# EAGLE board zeta2rework_lw_v29_rework (EAGLE 9.3.1)
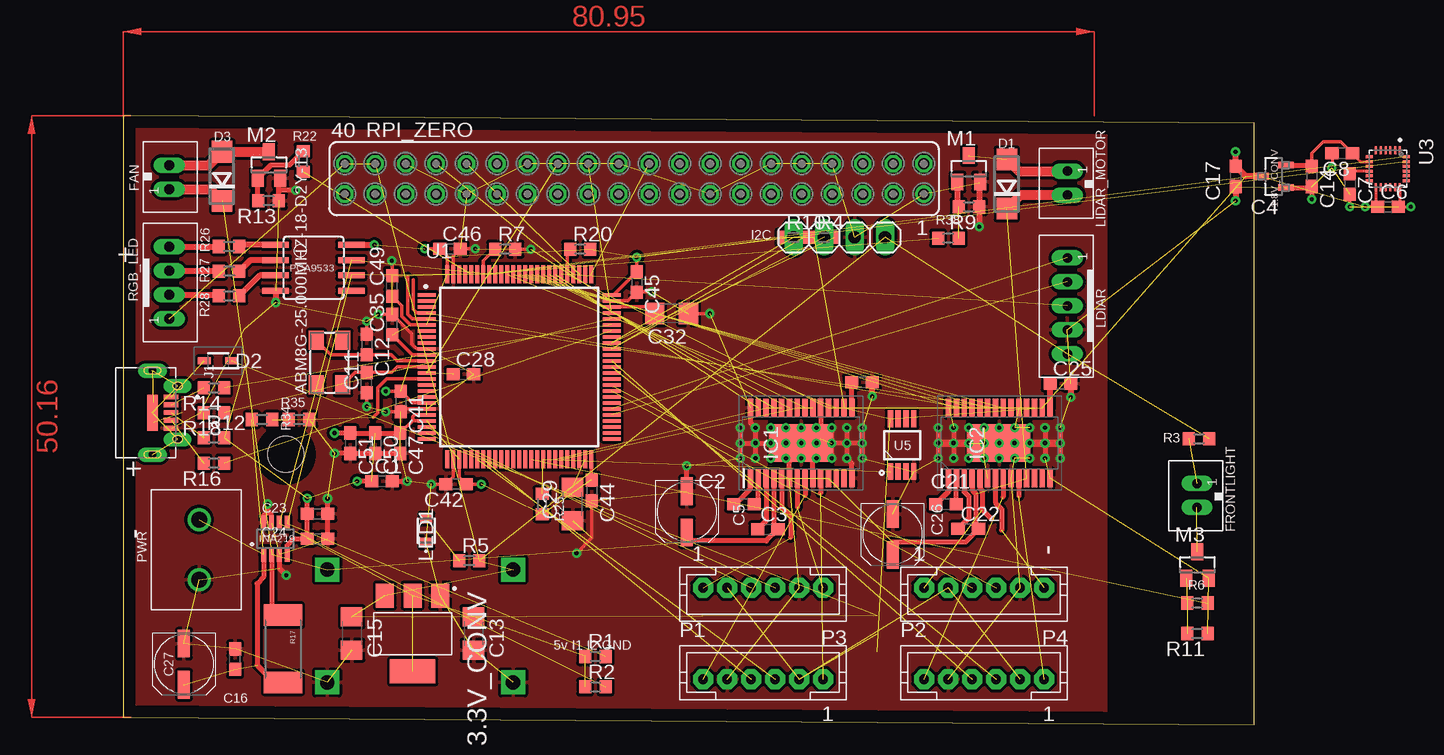
[diagram p0: board, top side]
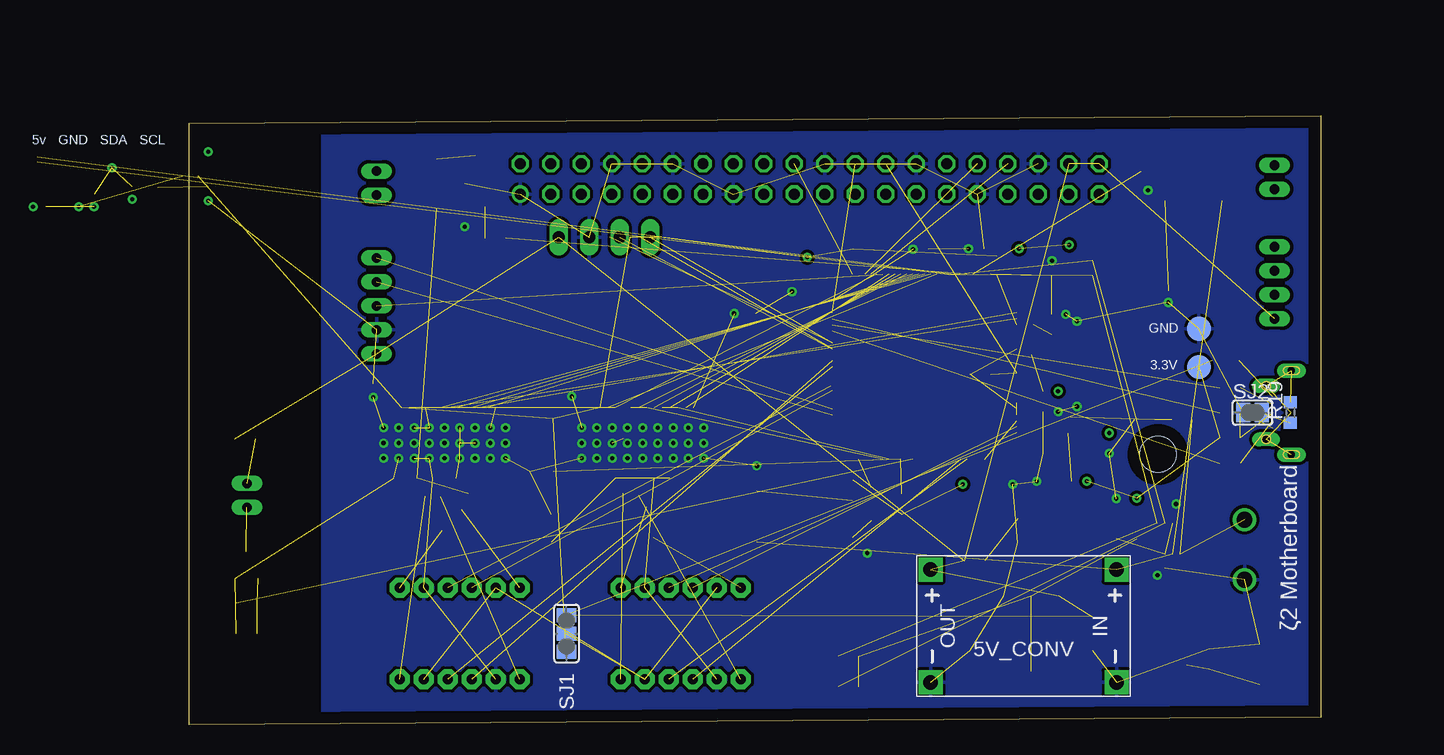
[diagram p1: board, bottom side, seen from below]

Size 94.29 x 50.79 mm. Coordinates in mm from the lower left corner, seen from the top.
Outline: 0,0.64 94.29,0 94.29,50.16 0,50.79 0,0.64
Copper layers (1+2*15+16): Top 0.035mm / dielectric 1.5mm / Route2 0.035mm / dielectric 0.15mm / Route15 0.035mm / dielectric 0.2mm / Bottom 0.035mm
Design rules "default *": minimum track width 6mil, minimum drill 0.35mm, track to track 6mil, track to pad 6mil, pad to pad 6mil, via to via 6mil, smd to smd 6mil, copper to edge 40mil, drill to drill 6mil, minimum pad ring 10mil, minimum via ring 8mil, stop-mask expansion 4mil, vias tented up to drill 0mil, thermal gap 10mil
Net classes: 0 default: clearance 0.152 mm
Holes 3 mm at 13.56,22.56

## Footprints (pad centres in the part's own frame; a part is rotated, then mirrored left to right if it is on the bottom)
SOT95P237X112-3N = smd 0.559 x 1.27: 1 -0.94,-1.041; 2 0.94,-1.041; 3 0,1.041
TP20R = smd 2 x 2: TP 0,0
SOT230P700X175-4N = smd 2 x 1.5: 1 -3.15,2.3; 2 -3.15,0; 3 -3.15,-2.3 | smd 2 x 3.8: 4 3.15,0
DC-DC-STEP-DOWN-MP2307 = drill 1.2 pad 2 square: IN+ -7.747,-4.699; IN- -7.747,4.699; OUT+ 7.747,-4.699; OUT- 7.747,4.699
5.0X3.2_KX-9A = smd 1.6 x 1.25: 1 -1.85,-1.1; 2 1.85,-1.1; 3 1.85,1.1; 4 -1.85,1.1
C0603 = smd 1.1 x 1: 1 -0.85,0; 2 0.85,0
UD-5X5,8_NICHICON = smd 2.3 x 1: + 1.725,0; - -1.7,0
C1206 = smd 1.6 x 1.8: 1 -1.4,0; 2 1.4,0
DO214AC = smd 1.8 x 1.7: A 2.05,0; C -2.05,0
SOD2513X117N = smd 1.085 x 0.55: 1 -1.14,0; 2 1.14,0
JST_B2B-PH_HEADER = drill 0.8 long: P1 1.075,0.048; P2 -0.925,0.048
1X04 = drill 1.016 long: 1 -3.81,0; 2 -1.27,0; 3 1.27,0; 4 3.81,0
SOP65P640X120-29N = smd 1.475 x 0.45: 1 -2.938,4.225; 2 -2.938,3.575; 3 -2.938,2.925; 4 -2.938,2.275; 5 -2.938,1.625; 6 -2.938,0.975; 7 -2.938,0.325; 8 -2.938,-0.325; 9 -2.938,-0.975; 10 -2.938,-1.625; 11 -2.938,-2.275; 12 -2.938,-2.925; 13 -2.938,-3.575; 14 -2.938,-4.225; 15 2.938,-4.225; 16 2.938,-3.575; 17 2.938,-2.925; 18 2.938,-2.275; 19 2.938,-1.625; 20 2.938,-0.975; 21 2.938,-0.325; 22 2.938,0.325; 23 2.938,0.975; 24 2.938,1.625; 25 2.938,2.275; 26 2.938,2.925; 27 2.938,3.575; 28 2.938,4.225 | smd 3.1 x 5.18: 29 0,0
SOT23-8 = smd 0.4 x 1.2: 1 -0.975,-1.3; 2 -0.325,-1.3; 3 0.325,-1.3; 4 0.975,-1.3; 5 0.975,1.3; 6 0.325,1.3; 7 -0.325,1.3; 8 -0.975,1.3
CUI_UJ2-MIBH2-4-SMT-TR = smd 0.4 x 1.2: 1 -1.3,2.1; 2 -0.65,2.1; 3 0,2.1; 4 0.65,2.1; 5 1.3,2.1 | drill 0.6 pad 1.2 long: SH1 -3.5,0.55; SH4 3.5,0.55 | drill 0.65 pad 1.1 long: SH2 -2.225,2.65; SH3 2.225,2.65 | smd 3 x 0.9: SH5 0,0.55
JST_B5B-PH_HEADER = drill 0.8 long: P1 4,0.048; P2 2,0.048; P3 0,0.048; P4 -2,0.048; P5 -4,0.048
LTM673-N1R2-25 = smd 0.8 x 1: 1 -1,0; 2 1,0
SOT23 = smd 1 x 1.4: 1 -0.95,-1.1; 2 0.95,-1.1; 3 0,1.1
JST-PH6 = drill 0.813 pad 1.676 octagon: 1 5,0; 2 3,0; 3 1,0; 4 -1,0; 5 -3,0; 6 -5,0
SOIC8 = smd 0.5 x 2.2: 1 -1.905,-3.154; 2 -0.645,-3.154; 3 0.625,-3.154; 4 1.895,-3.154; 5 1.905,3.154; 6 0.635,3.154; 7 -0.635,3.154; 8 -1.905,3.154
691137710002 = drill 1.3: 1 -2.5,0; 2 2.5,0
R0603 = smd 1 x 1.1: 1 -0.85,0; 2 0.85,0
2512 = smd 1.8 x 3.2: 1 -2.8,0; 2 2.8,0
JST_B4B-PH_HEADER = drill 0.8 long: P1 2.98,0.048; P2 0.98,0.048; P3 -1.02,0.048; P4 -3.02,0.048
FE20-2 = drill 0.914: 1 -24.13,1.27 | drill 0.914 octagon: 2 -24.13,-1.27; 3 -21.59,1.27; 4 -21.59,-1.27; 5 -19.05,1.27; 6 -19.05,-1.27; 7 -16.51,1.27; 8 -16.51,-1.27; 9 -13.97,1.27; 10 -13.97,-1.27; 11 -11.43,1.27; 12 -11.43,-1.27; 13 -8.89,1.27; 14 -8.89,-1.27; 15 -6.35,1.27; 16 -6.35,-1.27; 17 -3.81,1.27; 18 -3.81,-1.27; 19 -1.27,1.27; 20 -1.27,-1.27; 21 1.27,1.27; 22 1.27,-1.27; 23 3.81,1.27; 24 3.81,-1.27; 25 6.35,1.27; 26 6.35,-1.27; 27 8.89,1.27; 28 8.89,-1.27; 29 11.43,1.27; 30 11.43,-1.27; 31 13.97,1.27; 32 13.97,-1.27; 33 16.51,1.27; 34 16.51,-1.27; 35 19.05,1.27; 36 19.05,-1.27; 37 21.59,1.27; 38 21.59,-1.27; 39 24.13,1.27; 40 24.13,-1.27
SJ_2 = smd 1.168 x 1.6: 1 -1.524,0; 2 0,0; 3 1.524,0
SJ = smd 1.168 x 1.6: 1 -0.762,0; 2 0.762,0
QFP50P1600X1600X160-100N = smd 1.5 x 0.3: 1 -7.7,6; 2 -7.7,5.5; 3 -7.7,5; 4 -7.7,4.5; 5 -7.7,4; 6 -7.7,3.5; 7 -7.7,3; 8 -7.7,2.5; 9 -7.7,2; 10 -7.7,1.5; 11 -7.7,1; 12 -7.7,0.5; 13 -7.7,0; 14 -7.7,-0.5; 15 -7.7,-1; 16 -7.7,-1.5; 17 -7.7,-2; 18 -7.7,-2.5; 19 -7.7,-3; 20 -7.7,-3.5; 21 -7.7,-4; 22 -7.7,-4.5; 23 -7.7,-5; 24 -7.7,-5.5; 25 -7.7,-6; 51 7.7,-6; 52 7.7,-5.5; 53 7.7,-5; 54 7.7,-4.5; 55 7.7,-4; 56 7.7,-3.5; 57 7.7,-3; 58 7.7,-2.5; 59 7.7,-2; 60 7.7,-1.5; 61 7.7,-1; 62 7.7,-0.5; 63 7.7,0; 64 7.7,0.5; 65 7.7,1; 66 7.7,1.5; 67 7.7,2; 68 7.7,2.5; 69 7.7,3; 70 7.7,3.5; 71 7.7,4; 72 7.7,4.5; 73 7.7,5; 74 7.7,5.5; 75 7.7,6 | smd 0.3 x 1.5: 26 -6,-7.7; 27 -5.5,-7.7; 28 -5,-7.7; 29 -4.5,-7.7; 30 -4,-7.7; 31 -3.5,-7.7; 32 -3,-7.7; 33 -2.5,-7.7; 34 -2,-7.7; 35 -1.5,-7.7; 36 -1,-7.7; 37 -0.5,-7.7; 38 0,-7.7; 39 0.5,-7.7; 40 1,-7.7; 41 1.5,-7.7; 42 2,-7.7; 43 2.5,-7.7; 44 3,-7.7; 45 3.5,-7.7; 46 4,-7.7; 47 4.5,-7.7; 48 5,-7.7; 49 5.5,-7.7; 50 6,-7.7; 76 6,7.7; 77 5.5,7.7; 78 5,7.7; 79 4.5,7.7; 80 4,7.7; 81 3.5,7.7; 82 3,7.7; 83 2.5,7.7; 84 2,7.7; 85 1.5,7.7; 86 1,7.7; 87 0.5,7.7; 88 0,7.7; 89 -0.5,7.7; 90 -1,7.7; 91 -1.5,7.7; 92 -2,7.7; 93 -2.5,7.7; 94 -3,7.7; 95 -3.5,7.7; 96 -4,7.7; 97 -4.5,7.7; 98 -5,7.7; 99 -5.5,7.7; 100 -6,7.7
QFN40P300X300X105-25N = smd 0.64 x 0.22: 1 -1.545,1; 2 -1.545,0.6; 3 -1.545,0.2; 4 -1.545,-0.2; 5 -1.545,-0.6; 6 -1.545,-1; 13 1.545,-1; 14 1.545,-0.6; 15 1.545,-0.2; 16 1.545,0.2; 17 1.545,0.6; 18 1.545,1 | smd 0.22 x 0.64: 7 -1,-1.545; 8 -0.6,-1.545; 9 -0.2,-1.545; 10 0.2,-1.545; 11 0.6,-1.545; 12 1,-1.545; 19 1,1.545; 20 0.6,1.545; 21 0.2,1.545; 22 -0.2,1.545; 23 -0.6,1.545; 24 -1,1.545
SOP65P490X95-8N = smd 1.4 x 0.45: 1 -2.2,0.975; 2 -2.2,0.325; 3 -2.2,-0.325; 4 -2.2,-0.975; 5 2.2,-0.975; 6 2.2,-0.325; 7 2.2,0.325; 8 2.2,0.975

## Placement (x,y rotation side)
1.8V_CONV  MCP1700T-1802E/TT  [SOT95P237X112-3N]  95.89,45.72 90 top
3.3V  TPSQTP20R  [TP20R]  10.16,29.84 0 bottom
3.3V_CONV  NCP1117LPST33T3G  [SOT230P700X175-4N]  24.13,7.62 270 top
5V_CONV  DC-DC-STEP-DOWN-MP2307  [DC-DC-STEP-DOWN-MP2307]  24.77,8.26 180 bottom
ABM8G-25.000MHZ-18-D2Y-T3  25mhz  [5.0X3.2_KX-9A]  17.22,30.2 90 top
C1  4.7µf  [C0603]  21.59,20.32 0 top
C2  0.01µf 100v  [C0603]  51.75,18.41 0 top
C3  0.1µF 16v  [C0603]  53.73,16.31 0 top
C4  0.47µF 6.3v  [C0603]  61.58,28.57 0 top
C5  47µF  [UD-5X5,8_NICHICON]  46.99,17.78 270 top
C6  0.1nF  [C0603]  105.41,43.18 0 top  (outside the outline)
C7  0.1nF  [C0603]  102.23,45.09 270 top  (outside the outline)
C8  0.1nF  [C0603]  101.6,47.62 180 top  (outside the outline)
C11  Xpf  [C0603]  20.29,28.52 90 top
C12  Xpf  [C0603]  20.29,31.7 270 top
C13  10µF  [C1206]  29.21,7.62 270 top
C14  1µF  [C0603]  99.06,45.72 270 top  (outside the outline)
C15  10µF  [C1206]  19.05,7.62 270 top
C16  0.1µF  [C0603]  9.35,5.49 90 top
C17  1µF  [C0603]  92.71,45.72 270 top
C21  0.01µf 100v  [C0603]  68.58,18.41 0 top
C22  0.1µF 16v  [C0603]  70.43,16.33 0 top
C23  100nf  [C0603]  16.21,17.6 0 top
C24  0.1µF  [C0603]  16.21,15.52 0 top
C25  0.47µF 6.3v  [C0603]  78.12,28.45 0 top
C26  47µF  [UD-5X5,8_NICHICON]  64.14,15.88 270 top
C27  100µF  [UD-5X5,8_NICHICON]  5.08,5.08 270 top
C28  100nF  [C0603]  28.36,29.21 0 top
C29  2.2µf Low ESR < 2ohm  [C1206]  37.46,18.41 90 top
C32  2.2µf Low ESR < 2ohm  [C1206]  45.72,34.29 180 top
C35  100nF  [C0603]  22.43,33.36 90 top
C41  100nF  [C0603]  23.14,26.95 270 top
C42  100nF  [C0603]  27.75,20.07 180 top
C44  100nF  [C0603]  39.07,19.54 270 top
C45  100nF  [C0603]  42.8,36.92 270 top
C46  100nF  [C0603]  27.24,39.67 0 top
C47  100nF  [C0603]  23.11,23.48 270 top
C49  100nF  [C0603]  22.43,36.59 90 top
C50  100nF  [C0603]  21.03,23.48 270 top
C51  1µf  [C0603]  18.95,23.48 270 top
D1  1N4004 SMD  [DO214AC]  73.66,45.09 90 top
D2  BAT60JFILM  [SOD2513X117N]  7.92,30.35 180 top
D3  1N4004 SMD  [DO214AC]  8.26,45.72 90 top
FAN  JST-PH_2-PIN_HEADER  [JST_B2B-PH_HEADER]  3.81,45.72 270 top
FRONTLIGHT  JST-PH_2-PIN_HEADER  [JST_B2B-PH_HEADER]  89.54,19.05 90 top
GND  TPSQTP20R  [TP20R]  10.16,33.02 0 bottom
I2C  [1X04]  59.69,40.64 0 top
IC1  DRV8844PWPR  [SOP65P640X120-29N]  56.52,23.49 90 top
IC2  DRV8844PWPR  [SOP65P640X120-29N]  73.03,23.49 90 top
INA219  INA219  [SOT23-8]  12.7,15.52 0 top
J1  UJ2-MIBH2-4-SMT-TR  [CUI_UJ2-MIBH2-4-SMT-TR]  1.91,26.03 270 top
LDIAR  JST-PH_5-PIN_HEADER  [JST_B5B-PH_HEADER]  78.74,34.92 90 top
LED1  LT M673  [LTM673-N1R2-25]  25.27,16.21 90 top
LIDAR_MOTOR  JST-PH_2-PIN_HEADER  [JST_B2B-PH_HEADER]  78.74,45.09 90 top
M1  IRLML2502  [SOT23]  70.48,46.35 0 top
M2  IRLML2502  [SOT23]  12.17,46.66 0 top
M3  IRLML2502  [SOT23]  89.54,13.33 0 top
P1  [JST-PH6]  53.34,3.81 0 top
P2  [JST-PH6]  71.76,3.81 0 top
P3  [JST-PH6]  53.34,11.43 180 top
P4  [JST-PH6]  71.76,11.43 180 top
PCA9533  PCA9533  [SOIC8]  15.88,38.1 270 top
PWR  691137710002  [691137710002]  6.35,14.6 270 top
R1  10k  [R0603]  39.37,5.71 0 top
R2  10k  [R0603]  39.37,3.18 0 top
R3  0R  [R0603]  89.66,23.85 180 top
R4  10k  [R0603]  58.42,40.64 0 top
R5  220R  [R0603]  28.85,13.69 0 top
R6  22R  [R0603]  89.54,10.16 180 top
R7  10k  [R0603]  31.85,39.65 0 top
R9  100k  [R0603]  70.48,43.18 180 top
R10  10k  [R0603]  55.88,40.64 0 top
R11  100k  [R0603]  89.54,7.62 180 top
R12  1k5  [R0603]  7.57,23.93 0 top
R13  100k  [R0603]  12.14,43.69 180 top
R14  22r  [R0603]  7.57,28.09 180 top
R16  100k  [R0603]  7.57,21.82 180 top
R17  0.1/1% (PT2512FK-070R1L)  [2512]  13.33,6.35 270 top
R18  22r  [R0603]  7.57,26.01 180 top
R19  100r  [R0603]  2.54,26.03 90 bottom
R20  100k  [R0603]  38.1,39.65 0 top
R22  22R  [R0603]  15.01,46.96 90 top
R25  4k7  [R0603]  34.92,18.41 270 top
R26  220R  [R0603]  8.84,39.88 180 top
R27  220R  [R0603]  8.84,37.82 180 top
R28  220R  [R0603]  8.84,35.76 180 top
R34  100k  [R0603]  11.58,25.45 180 top
R35  69k  [R0603]  14.68,25.45 180 top
R38  22R  [R0603]  68.78,40.56 0 top
RGB_LED  JST-PH_4-PIN_HEADER  [JST_B4B-PH_HEADER]  3.81,36.83 270 top
RPI_ZERO  [FE20-2]  42.6,45.52 180 top
SJ1  [SJ_2]  62.86,7.62 270 bottom
SJ2  [SJ]  5.69,26.03 0 bottom
U1  STM32F427VI  [QFP50P1600X1600X160-100N]  33.02,29.84 0 top
U3  ICM-20948  [QFN40P300X300X105-25N]  105.41,46.35 270 top  (outside the outline)
U5  DS18B20U+  [SOP65P490X95-8N]  64.92,23.32 90 top

## Library data of the parts
1.8V_CONV = MCP1700T-2102E_TT; AVAILABILITY: Unavailable; DESCRIPTION: 250mA CMOS LDO, Isupply 1uA and 2% VoutAccuracy; MF: Microchip; MP: MCP1700T-2102E/TT; PACKAGE: SOT-23 Microchip; PRICE: None
3.3V GND = testpad
3.3V_CONV = NCP1117LPST33T3G; AVAILABILITY: Unavailable; DESCRIPTION: Linear Voltage Regulator, Positive, LDO, 1.0 A _Fixed and Adjustable_ Vout: 3.3 V; MF: ON Semiconductor; MP: NCP1117LPST33T3G; PACKAGE: SOT-223 ON Semiconductor; PRICE: None
5V_CONV = diy-modules
ABM8G-25.000MHZ-18-D2Y-T3 = crystal-geyer_V1_0
C1-C8 C11-C17 C21-C29 C32 C35 C41 C42 C44-C47 C49-C51 = rcl; SPICEPREFIX: C
D1 D3 = diode
D2 = BAT60JFILM; ALLIED_NUMBER: 70389806; ALLIED_PRICE-STOCK: http://www.alliedelec.com/stmicroelectronics-bat60jfilm/70389806/; DESCRIPTION: BAT60JFILM, Schottky Diode, 3A max, 10V, 2-Pin, SOD-323; HEIGHT: 1.17mm; MANUFACTURER_NAME: STMicroelectronics; MANUFACTURER_PART_NUMBER: BAT60JFILM; MOUSER_PART_NUMBER: 511-BAT60JFILM; MOUSER_PRICE-STOCK: https://www.mouser.com/Search/Refine.aspx?Keyword=511-BAT60JFILM; RS_PART_NUMBER: 1458781; RS_PRICE-STOCK: http://uk.rs-online.com/web/p/products/1458781
FAN FRONTLIGHT LDIAR LIDAR_MOTOR RGB_LED = srg
I2C = pinhead
IC1 IC2 = DRV8844PWPR; DESCRIPTION: 5A Brushed DC motor or Quad 1.75A Solenoid/Relay Driver with +/-30V split supply support (PWM Ctrl); HEIGHT: 1.2mm; MANUFACTURER_NAME: Texas Instruments; MANUFACTURER_PART_NUMBER: DRV8844PWPR; MOUSER_PART_NUMBER: 595-DRV8844PWPR; MOUSER_PRICE-STOCK: https://www.mouser.com/Search/Refine.aspx?Keyword=595-DRV8844PWPR
INA219 = INA219; AVAILABILITY: Unavailable; DESCRIPTION: the ina219 is a high-side current shunt and power monitor with an i2c interface. the ina219 monitors both shunt drop ...; MF: Texas Instruments; MP: INA219; PACKAGE: None; PRICE: None
J1 = UJ2-MIBH2-4-SMT-TR; AVAILABILITY: Unavailable; CUI_PURCHASE_URL: https://www.cui.com/product/interconnect/usb-connectors/micro-b/uj2-mibh2-4-smt?utm_source=snapeda.com&utm_medium=referral&utm_campaign=snapedaBOM; DESCRIPTION: Micro B Type 5 Pin Horizontal 30 µin Plating SMT USB Jack 2.0; MF: CUI Inc.; MP: UJ2-MIBH2-4-SMT-TR; PACKAGE: None; PRICE: None
LED1 = LT_M673-N1R2-25; DESCRIPTION: Osram Opto LT M673-N1R2-25, Mini TOPLED Series Green LED, 529 nm,, Rectangle Lens SMD Package; HEIGHT: mm; MANUFACTURER_NAME: OSRAM Opto Semiconductors; MANUFACTURER_PART_NUMBER: LT M673-N1R2-25; MOUSER_PART_NUMBER: 720-LTM673N1R225Z; MOUSER_PRICE-STOCK: https://www.mouser.com/Search/Refine.aspx?Keyword=720-LTM673N1R225Z; RS_PART_NUMBER: 9133231; RS_PRICE-STOCK: http://uk.rs-online.com/web/p/products/9133231
M1-M3 = IRLML2502TRPBF; AVAILABILITY: Unavailable; DESCRIPTION: Single N-Channel 20 V 0.08 Ohm 12 nC 1.25 W Silicon SMT Mosfet - SOT-23; MF: Infineon; MP: IRLML2502TRPBF; PACKAGE: SOT-23-3 Infineon; PRICE: None
P1-P4 = jst-ph
PCA9533 = adam - ics
PWR = term block; AVAILABILITY: Unavailable; DESCRIPTION: Term Block 2pos Side Entry 5mm; MF: Wurth Electronics; MP: 691137710002; PACKAGE: None; PRICE: None
R1-R7 R9-R14 R16 R18-R20 R22 R25-R28 R34 R35 R38 = rcl; SPICEPREFIX: R
R17 = microbuilder
RPI_ZERO = con-lsta; OC_FARNELL: unknown; OC_NEWARK: unknown
SJ1 SJ2 = jumper
U1 = STM32F427VGT7; AVAILABILITY: Unavailable; DESCRIPTION: Ic Mcu 32bit 1mb Flash 100lqfp; MF: STMicroelectronics; MP: STM32F427VGT7; PACKAGE: LQFP-100 STMicroelectronics; PRICE: None
U3 = ICM-20948; AVAILABILITY: Unavailable; DESCRIPTION: 9 Axis=3 Axis Gyro+3 Axis Accel+Compass. Pin For Pin With m; MF: TDK InvenSense; MP: ICM-20948; PACKAGE: QFN-24 InvenSense; PRICE: None
U5 = DS18B20U_; AVAILABILITY: Unavailable; DESCRIPTION: Date Code: 1043+; RoHS Compliant: Yes;; MF: Maxim; MP: DS18B20U+; PACKAGE: TSSOP-8 Chip Coolers; PRICE: None

## Nets
+1.8V: 1.8V_CONV.2 C8.1 C14.1 U3.8
+3V3: 1.8V_CONV.3 3.3V.TP 3.3V_CONV.2 3.3V_CONV.4 C1.1 C6.1 C13.1 C17.1 C23.1 C24.1 C35.1 C41.1 C42.1 C44.1 C45.1 C46.1 C47.1 C49.1 C50.1 C51.1 IC1.16 IC2.16 INA219.4 PCA9533.8 R1.1 R2.1 R4.1 R10.1 R12.2 R20.2 R25.2 SJ1.3 U1.6 U1.11 U1.19 U1.21 U1.22 U1.28 U1.50 U1.75 U1.100 U3.13 U5.8
+5V: 3.3V_CONV.3 5V_CONV.OUT+ C15.1 D2.1 I2C.4 LDIAR.P5 R3.1 R5.2 RGB_LED.P1 RPI_ZERO.38 RPI_ZERO.40 SJ1.1
+8V: 5V_CONV.IN+ C3.2 C5.+ C22.2 C26.+ D1.C D3.C FAN.P1 IC1.4 IC1.11 IC2.4 IC2.11 INA219.2 LIDAR_MOTOR.P2 R17.1
BAT_LVL: R34.1 R35.2 U1.15
DEC_LB_1: P1.3 U1.31
DEC_LB_2: P1.4 U1.32
DEC_LF_1: P3.3 U1.23
DEC_LF_2: P3.4 U1.24
DEC_RB_1: P2.3 U1.63
DEC_RB_2: P2.4 U1.64
DEC_RF_1: P4.3 U1.59
DEC_RF_2: P4.4 U1.60
GND: 1.8V_CONV.1 3.3V_CONV.1 5V_CONV.IN- 5V_CONV.OUT- C1.2 C4.2 C5.- C6.2 C7.2 C8.2 C11.1 C12.1 C13.2 C14.2 C15.2 C16.2 C17.2 C23.2 C24.2 C25.2 C26.- C27.- C28.2 C29.1 C32.1 C35.2 C41.2 C42.2 C44.2 C45.2 C46.2 C47.2 C49.2 C50.2 C51.2 GND.TP I2C.3 IC1.6 IC1.9 IC1.14 IC1.19 IC1.28 IC1.29 IC2.6 IC2.9 IC2.14 IC2.19 IC2.28 IC2.29 INA219.3 INA219.7 INA219.8 J1.5 LDIAR.P4 LED1.1 M1.2 M2.2 M3.2 P1.5 P2.5 P3.5 P4.5 PCA9533.4 PWR.2 R7.2 R9.1 R11.1 R13.1 R35.1 RPI_ZERO.1 RPI_ZERO.8 RPI_ZERO.12 RPI_ZERO.15 RPI_ZERO.22 RPI_ZERO.28 RPI_ZERO.31 RPI_ZERO.36 SJ2.1 U1.10 U1.20 U1.27 U1.74 U1.99 U3.18 U5.4
I2C1_SCL: INA219.5 PCA9533.6 R1.2 U1.92 U3.23
I2C1_SDA: INA219.6 PCA9533.7 R2.2 U1.93 U3.24
I2C3_SCL: I2C.1 R4.2 U1.67
I2C3_SDA: I2C.2 R10.2 U1.66
LIDAR_POS_INT: LDIAR.P3 U1.81
M_LB_IN1: IC1.23 U1.84
M_LB_IN2: IC1.21 U1.85
M_LF_IN1: IC1.27 U1.82
M_LF_IN2: IC1.25 U1.83
M_PWM_LB: IC1.20 IC1.22 U1.45
M_PWM_LF: IC1.24 IC1.26 U1.44
M_PWM_RB: IC2.20 IC2.22 U1.5
M_PWM_RF: IC2.24 IC2.26 U1.4
M_RB_IN1: IC2.23 U1.88
M_RB_IN2: IC2.21 U1.89
M_RF_IN1: IC2.27 U1.86
M_RF_IN2: IC2.25 U1.87
M_SLEEP: IC1.17 IC2.17 U1.90
N$1: C21.2 IC2.2
N$2: C21.1 IC2.1
N$3: C22.1 IC2.3
N$4: IC2.10 P2.1
N$5: J1.3 R12.1 R18.2
N$6: FRONTLIGHT.P1 R3.2
N$7: LED1.2 R5.1
N$8: C7.1 U3.10
N$9: FRONTLIGHT.P2 M3.3
N$10: M3.1 R6.2 R11.2
N$11: IC2.5 P4.1
N$12: IC2.7 P4.6
N$13: ABM8G-25.000MHZ-18-D2Y-T3.1 C11.2 U1.13
N$14: IC1.5 P3.1
N$15: D2.2 J1.1
N$16: R7.1 U1.94
N$17: J1.4 R16.2
N$18: C2.2 IC1.2
N$19: IC2.8 P2.6
N$20: C2.1 IC1.1
N$21: C3.1 IC1.3
N$22: PCA9533.1 R26.1
N$23: PCA9533.2 R27.1
N$24: PCA9533.3 R28.1
N$25: R19.1 SJ2.2
N$26: C25.1 IC2.15
N$27: IC1.7 P3.6
N$28: IC1.8 P1.6
N$29: C4.1 IC1.15
N$30: IC1.10 P1.1
N$31: R26.2 RGB_LED.P4
N$32: P1.2 P2.2 P3.2 P4.2 SJ1.2
N$33: R27.2 RGB_LED.P3
N$34: J1.2 R14.2
N$35: R28.2 RGB_LED.P2
N$36: C29.2 U1.49
N$37: M2.1 R13.2 R22.2
N$38: M1.1 R9.2 R38.2
N$39: D1.A LIDAR_MOTOR.P1 M1.3
N$40: J1.SH1 J1.SH2 J1.SH3 J1.SH4 J1.SH5 R19.2
N$44: ABM8G-25.000MHZ-18-D2Y-T3.3 C12.2 U1.12
N$45: C32.2 U1.73
N$55: D3.A FAN.P2 M2.3
NFAULT: IC1.18 IC2.18 R20.1 U1.80
NRST: C28.1 RPI_ZERO.26 U1.14
PWM1: U1.47
PWM2: U1.48
PWM3: U1.35
PWM4: U1.36
PWM_FAN: R22.1 U1.96
PWM_LIDAR: R38.1 U1.95
PWM_LIGHT: R6.1 U1.40
SWCLK: RPI_ZERO.20 U1.76
SWDIO: RPI_ZERO.24 U1.72
TEMPERATURE: R25.1 U1.42 U5.1
UART2_RX: U1.26
UART2_TX: U1.25
UART3_RX: LDIAR.P1 U1.56
UART3_TX: LDIAR.P2 U1.55
UART4_RX: RPI_ZERO.34 U1.79
UART4_TX: RPI_ZERO.32 U1.78
USB_OTG_DM: R14.1 U1.70
USB_OTG_DP: R18.1 U1.71
USB_OTG_ID: R16.1 U1.69
USB_OTG_VBUS: U1.68
V+: C16.1 C27.+ INA219.1 PWR.1 R17.2 R34.2

## Tracks (layer width: path | path; a pad name or v marks a point on that pad's centre or on a via)
+1.8V
  Top 0.254: C8.1 103.12,46.95 U3.8
  Top 0.305: C14.1 99.06,47.62 100.03,48.59 101.48,48.59 C8.1
  Top 0.406: 1.8V_CONV.2 98.97,46.66 C14.1
+3V3  (via drill 0.35)  (27 unrouted)
  Top 0.254: U3.13 104.41,43.33 C6.1 v103.51,43.18
  Top 0.305: U1.28 28.02,20.65 C42.1 v29.85,20.07 | U1.50 39.02,20.44 C44.1 | U1.75 40.88,35.84 C45.1 v42.8,38.99 | U1.100 27.02,39.05 C46.1 v25.15,39.67 | U1.11 24.1,30.84 C35.1 | U1.6 23.96,33.34 23.23,34.07 23.23,34.93 C49.1 | v21.9,27.81 21.91,27.8 C41.1 24.09,26.84 U1.19 | U1.21 24.32,25.84 24.16,25.68 24.16,25.5 24.19,25.46 | U1.22 24.31,25.34 24.19,25.46 | 23.2,24.42 24.19,25.41 24.19,25.46
  Top 0.406: 23.2,24.42 C47.1 C50.1 C51.1 v17.63,24.33 | C1.1 v19.51,20.32 | INA219.4 13.67,14.95 14.25,15.52 C24.1 C23.1 15.36,18.88 v15.34,18.9
  Top 0.508: 1.8V_CONV.3 93.56,45.72 C17.1 v92.71,47.78 | PCA9533.8 v20.96,40
+5V  (11 unrouted)
+8V  (7 unrouted)
  Top 0.406: IC1.4 54.24,16.65 C3.2 53.62,15.34 47.09,15.34 46.99,15.24 C5.+ | IC2.4 70.75,19.58 71.04,19.28 71.04,16.57 C22.2 70.19,15.24 64.14,15.24 C26.+ | INA219.2 12.38,9.7 12.92,9.15 R17.1
  Top 0.813: FAN.P1 7.28,44.64 D3.C | LIDAR_MOTOR.P2 74.79,44.16 D1.C
BAT_LVL  (2 unrouted)
  Top 0.305: 20.85,25.65 21.21,26.01 21.21,28.1 21.96,28.84 U1.15
DEC_LB_1  (1 unrouted)
DEC_LB_2  (1 unrouted)
DEC_LF_1  (1 unrouted)
DEC_LF_2  (1 unrouted)
DEC_RB_1  (1 unrouted)
DEC_RB_2  (1 unrouted)
DEC_RF_1  (1 unrouted)
DEC_RF_2  (1 unrouted)
  Top 0.152: U1.60 40.84,28.22
GND  (via drill 0.35)  (72 unrouted)
  Top 0.254: U3.18 106.41,43.33 C6.2 v107.32,43.18 | C7.2 v102.23,43.18 | C8.2 100.75,46.45 v100.74,46.43
  Top 0.305: U1.27 27.52,20.69 C42.2 v25.68,20.07 | U1.74 42.08,35.34 C45.2 42.85,36.12 v44.07,36.12 | U1.99 27.52,39.1 C46.2 v29.36,39.67 | U1.10 24.49,31.34 24.05,31.79 24.05,32.6 C35.2 v21.26,34.21 | C12.1 20.32,32.57 v20.32,33.66 | 23.16,26.12 C41.2 | C41.2 21.9,26.1 v21.9,26.11 | C44.2 39.06,15.6 v37.79,14.33 | R7.2 v33.98,39.65 | C11.1 20.32,27.65 v20.32,26.54 | U1.20 23.39,26.34 C41.2 | C32.1 v48.89,34.29 | C49.2 22.43,38.66 v22.4,38.68
  Top 0.406: IC1.19 58.14,23.85 v57.78,23.49 | v55.24,23.49 v53.98,23.49 | v52.7,23.49 v52.7,24.77 52.29,25.18 IC1.28 | v52.7,23.49 v52.7,22.23 | v51.43,24.77 v51.43,23.49 | v51.43,23.49 v51.43,22.23 | v60.32,24.77 v60.32,23.49 | v60.32,23.49 v60.32,22.23 60.74,21.81 IC1.14 | v61.59,24.77 v61.59,23.49 | v61.59,23.49 v61.59,22.23 | v59.05,24.77 v59.05,23.49 | v59.05,23.49 v59.05,22.23 | v57.78,24.77 v57.78,23.49 | v57.78,23.49 v57.78,22.23 57.49,21.93 IC1.9 | v56.52,24.77 IC1.29 | IC1.29 v56.52,22.23 | v55.24,24.77 v55.24,23.49 | v55.24,23.49 v55.24,22.23 55.54,21.93 IC1.6 | v53.98,24.77 v53.98,23.49 | v53.98,23.49 v53.98,22.23 | v51.43,23.49 v52.7,23.49 | v52.7,23.49 v53.98,23.49 | IC1.29 v55.24,23.49 | v60.32,23.49 v59.05,23.49 | v61.59,23.49 v60.32,23.49 | IC1.29 v57.78,23.49 | C5.- v46.99,21.59 | 1.8V_CONV.1 98.97,44.78 C14.2 v99.06,43.81 | v67.95,24.77 v67.95,23.49 v67.95,22.23 | v69.22,24.77 v69.22,23.49 v69.22,22.23 | v70.48,24.77 v70.48,23.49 v70.48,22.23 | v73.03,24.77 IC2.29 v73.03,22.23 | v74.3,24.77 v74.3,23.49 v74.3,22.23 | v76.84,24.77 v76.84,23.49 v76.84,22.23 | v78.11,24.77 v78.11,23.49 v78.11,22.23 | C47.2 C50.2 C51.2 v17.63,22.63 | C1.2 v23.67,20.32 | M2.2 12.91,45.36 12.99,45.28 12.99,44.45 | R13.1 12.99,44.45 | v14.4,44.55 13.09,44.55 12.99,44.45 | INA219.3 13.03,13.06 v13.61,12.47 | INA219.7 12.38,17.47 12.06,17.78 | 12.06,17.78 11.72,17.44 INA219.8 | 12.06,17.78 v12.06,18.41 | C24.2 C23.2 v17.06,18.86 v17.04,18.87
  Top 0.508: C17.2 v92.71,43.69 | M1.2 71.34,45.16 R9.1 71.34,41.54 v71.35,41.53 | C25.2 v78.97,27.3 | v62.43,27.38 C4.2 | C4.2 | PCA9533.4 v12.72,35.21 v12.72,35.2
  Top 0.61: v67.95,23.49 v69.22,23.49 v70.48,23.49 | IC2.29 v71.76,23.49 | IC2.29 v74.3,23.49 | IC2.29 v75.57,23.49 | IC2.29 v76.84,23.49 v78.11,23.49
  other vias: 56.52,23.49 71.76,24.77 71.76,22.23 73.03,23.49 75.57,24.77 75.57,22.23
  pour Top (isolate 0.254, rank 3): -1.27,51.43 -1.27,0 81.92,0 81.92,51.43
  pour Bottom (isolate 0.254, rank 3): -2.54,-1.27 -2.54,52.7 83.19,52.7 83.19,-1.27
  cutout Top: 107.95,49.53 102.87,49.53 arc90 102.23,48.89 102.23,43.81 arc90 102.87,43.18 107.95,43.18 arc90 108.59,43.81 108.59,48.89 arc90
  cutout Bottom: 108.59,44.45 108.59,48.89 arc90 107.95,49.53 102.87,49.53 arc90 102.23,48.89 102.23,44.45 arc90 102.87,43.18 107.95,43.18 arc90
I2C1_SCL  (4 unrouted)
I2C1_SDA  (4 unrouted)
I2C3_SCL  (2 unrouted)
I2C3_SDA  (2 unrouted)
LIDAR_POS_INT  (1 unrouted)
M_LB_IN1  (1 unrouted)
M_LB_IN2  (1 unrouted)
M_LF_IN1  (1 unrouted)
M_LF_IN2  (1 unrouted)
M_PWM_LB  (2 unrouted)
M_PWM_LF  (2 unrouted)
M_PWM_RB  (2 unrouted)
  Top 0.305: U1.5 24.1,33.84 23.72,34.23 23.72,37.36
M_PWM_RF  (2 unrouted)
  Top 0.305: U1.4 24.48,34.34 24.18,34.65 24.18,37.11
M_RB_IN1  (1 unrouted)
M_RB_IN2  (1 unrouted)
M_RF_IN1  (1 unrouted)
M_RF_IN2  (1 unrouted)
M_SLEEP  (2 unrouted)
N$1
  Top 0.406: C21.2 69.43,20.54 IC2.2
N$2
  Top 0.406: IC2.1 68.8,19.48 C21.1
N$3
  Top 0.406: IC2.3 70.1,19.44 70.48,19.05 70.48,17.23 C22.1
N$4  (1 unrouted)
  Top 0.406: IC2.10 74.65,19.08
N$5  (2 unrouted)
N$6  (1 unrouted)
N$7  (1 unrouted)
N$8
  Top 0.254: U3.10 102.45,46.16 C7.1
N$9  (1 unrouted)
N$10  (2 unrouted)
N$11  (1 unrouted)
  Top 0.406: IC2.5 71.4,19.72 71.6,19.51 71.6,17.93 72.39,17.15
N$12  (1 unrouted)
  Top 0.406: IC2.7 72.7,18.54 73.23,18.01 73.23,16.23
N$13
  Top 0.305: U1.13 22.86,29.84 22.39,29.37 C11.2 19.35,29.37 ABM8G-25.000MHZ-18-D2Y-T3.1
N$14  (1 unrouted)
  Top 0.406: IC1.5 54.89,18.08 55.63,17.35 55.63,15.62
N$15  (1 unrouted)
N$16
  Top 0.305: U1.94 30.02,38.67 R7.1
N$17  (1 unrouted)
N$18
  Top 0.406: C2.2 52.94,18.75 IC1.2
N$19  (1 unrouted)
  Top 0.406: IC2.8 73.35,19
N$20
  Top 0.406: 51.03,18.41 C2.1 51.02,18.41 52.29,19.69 | IC1.1 52.29,19.69 | 52.29,19.69 52.29,19.68 52.12,19.51
N$21
  Top 0.406: IC1.3 53.59,17.01 C3.1
N$22
  Top 0.508: PCA9533.1 9.82,40 R26.1
N$23
  Top 0.508: PCA9533.2 10.61,38.74 R27.1
N$24
  Top 0.508: PCA9533.3 11.4,37.48 R28.1
N$25  (1 unrouted)
N$26
  Top 0.508: IC2.15 77.25,28.43 C25.1
N$27  (1 unrouted)
  Top 0.406: IC1.7 56.19,18.18
N$28  (1 unrouted)
  Top 0.406: IC1.8 56.84,19.13
N$29
  Top 0.406: IC1.15 C4.1
N$30  (1 unrouted)
  Top 0.406: IC1.10 58.14,19.33
N$31
  Top 0.508: RGB_LED.P4 7.96,39.85 R26.2
N$32  (4 unrouted)
N$33
  Top 0.508: R27.2 3.89,37.82 RGB_LED.P3
N$34  (1 unrouted)
N$35
  Top 0.508: RGB_LED.P2 7.9,35.85 R28.2
N$36  (1 unrouted)
N$37
  Top 0.406: R22.2 13.86,46.66 12.32,46.66 M2.1 11.22,43.76 R13.2
N$38  (1 unrouted)
  Top 0.508: M1.1 69.54,43.28 R9.2
N$39  (1 unrouted)
  Top 0.813: D1.A 74.64,46.16 LIDAR_MOTOR.P1
N$40  (5 unrouted)
N$44
  Top 0.305: U1.12 22.87,30.34 22.36,30.85 C12.2 17.32,30.85 ABM8G-25.000MHZ-18-D2Y-T3.3
N$45
  Top 0.305: U1.73 43.77,34.84 C32.2
N$55
  Top 0.813: FAN.P2 7.13,46.64 D3.A M2.3
NFAULT  (2 unrouted)
  Top 0.305: U1.80 37.02,39.42 R20.1
NRST  (2 unrouted)
PWM_FAN  (1 unrouted)
PWM_LIDAR  (1 unrouted)
PWM_LIGHT  (1 unrouted)
SWCLK  (1 unrouted)
SWDIO  (1 unrouted)
TEMPERATURE  (2 unrouted)
UART3_RX  (1 unrouted)
UART3_TX  (1 unrouted)
UART4_RX  (1 unrouted)
UART4_TX  (1 unrouted)
USB_OTG_DM  (1 unrouted)
USB_OTG_DP  (1 unrouted)
USB_OTG_ID  (1 unrouted)
V+  (4 unrouted)
  Top 0.406: INA219.1 11.72,12.33 11.18,11.79 11.18,4.98 12.6,3.55 R17.2
(copper drawn outside any net)
  shapes: Top area x2

## Text on the board
tNames: + | - + | - | 5v I1 I2 GND
bNames: 5v GND SDA SCL | ζ2 Motherboard